# EAGLE board 13585_Weather Shield_V12_Panel (EAGLE 7.5.0), part 1 of 2
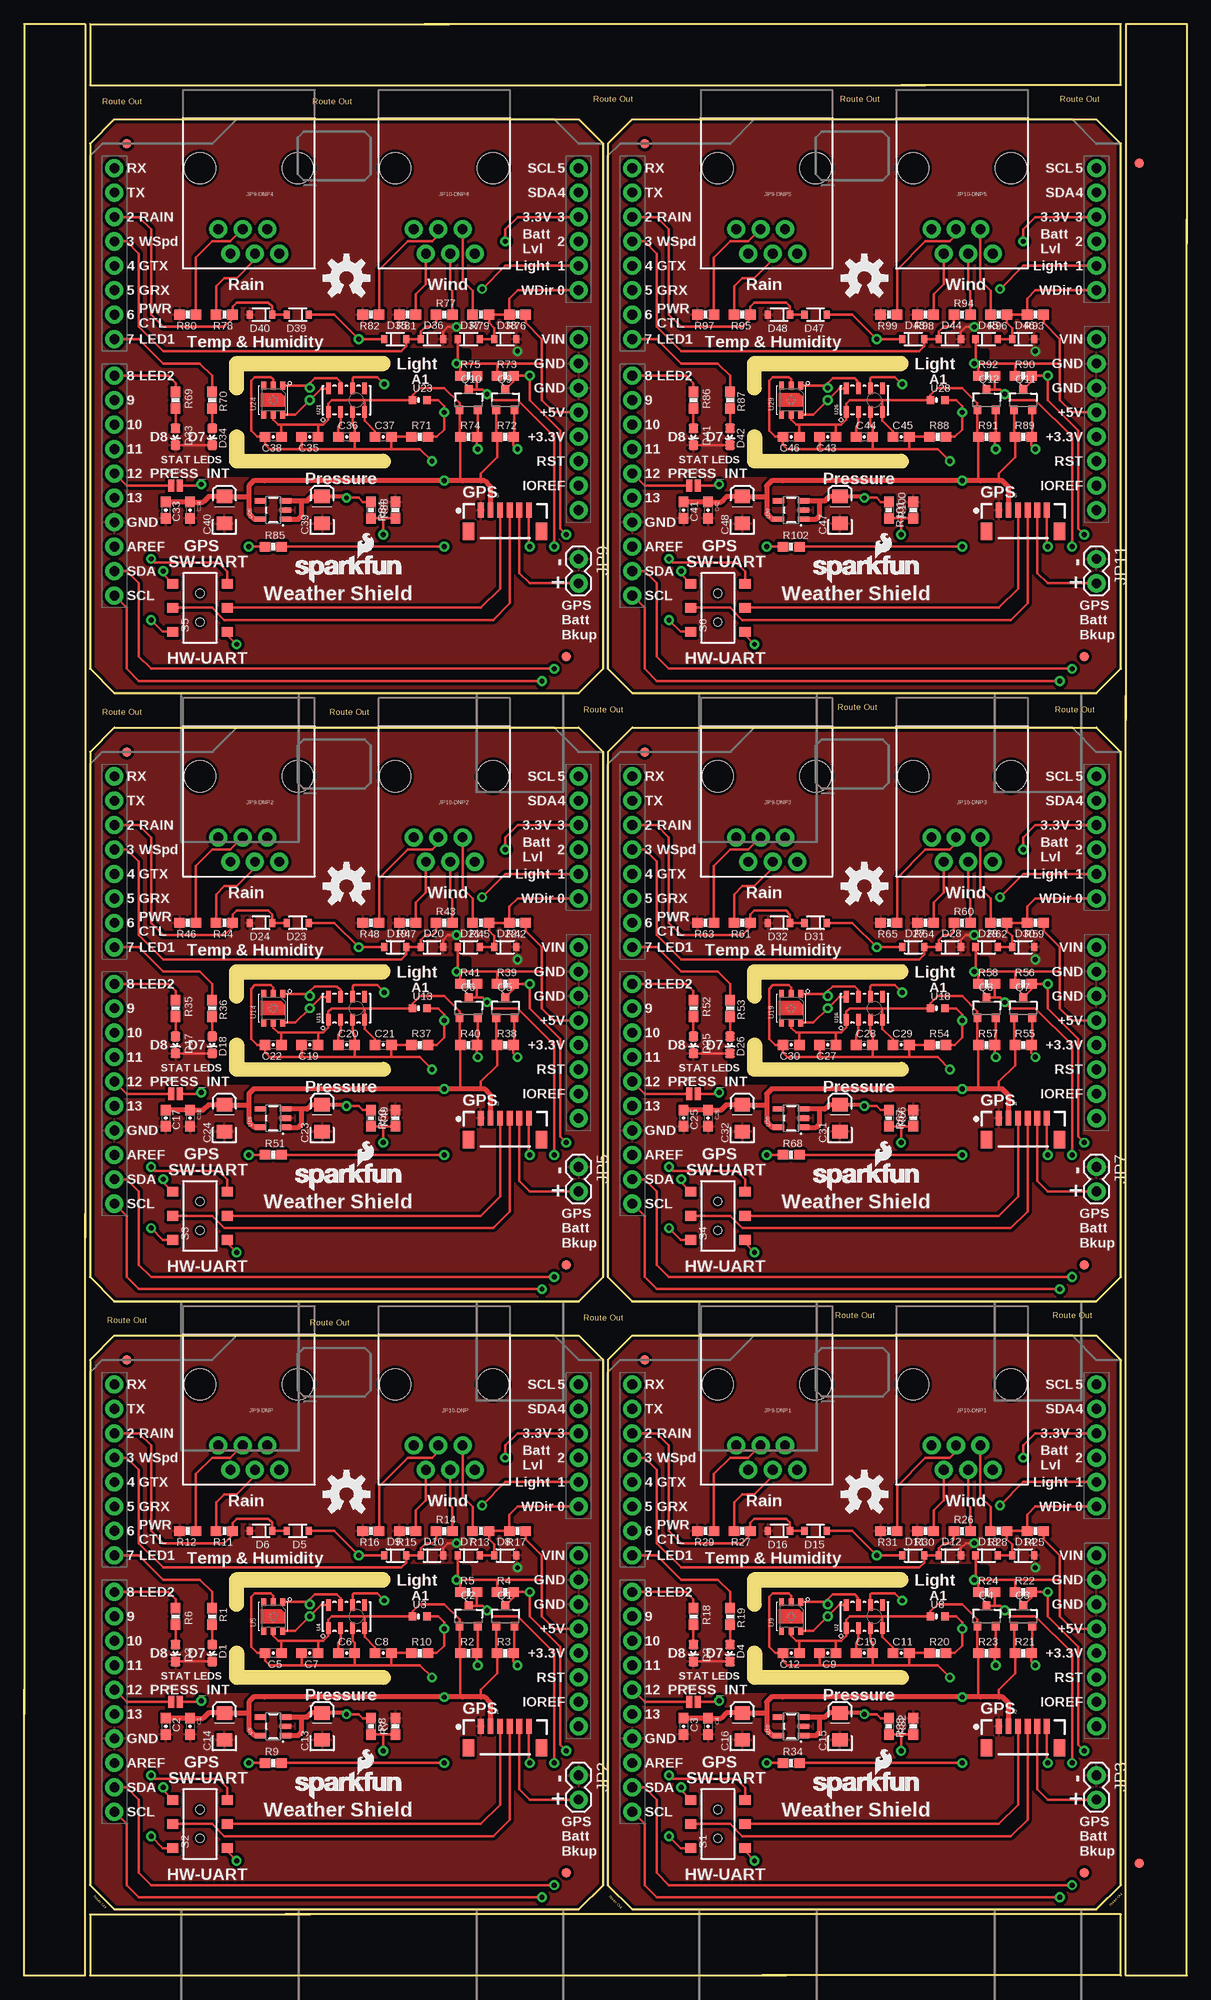
[diagram p0: board, top side]
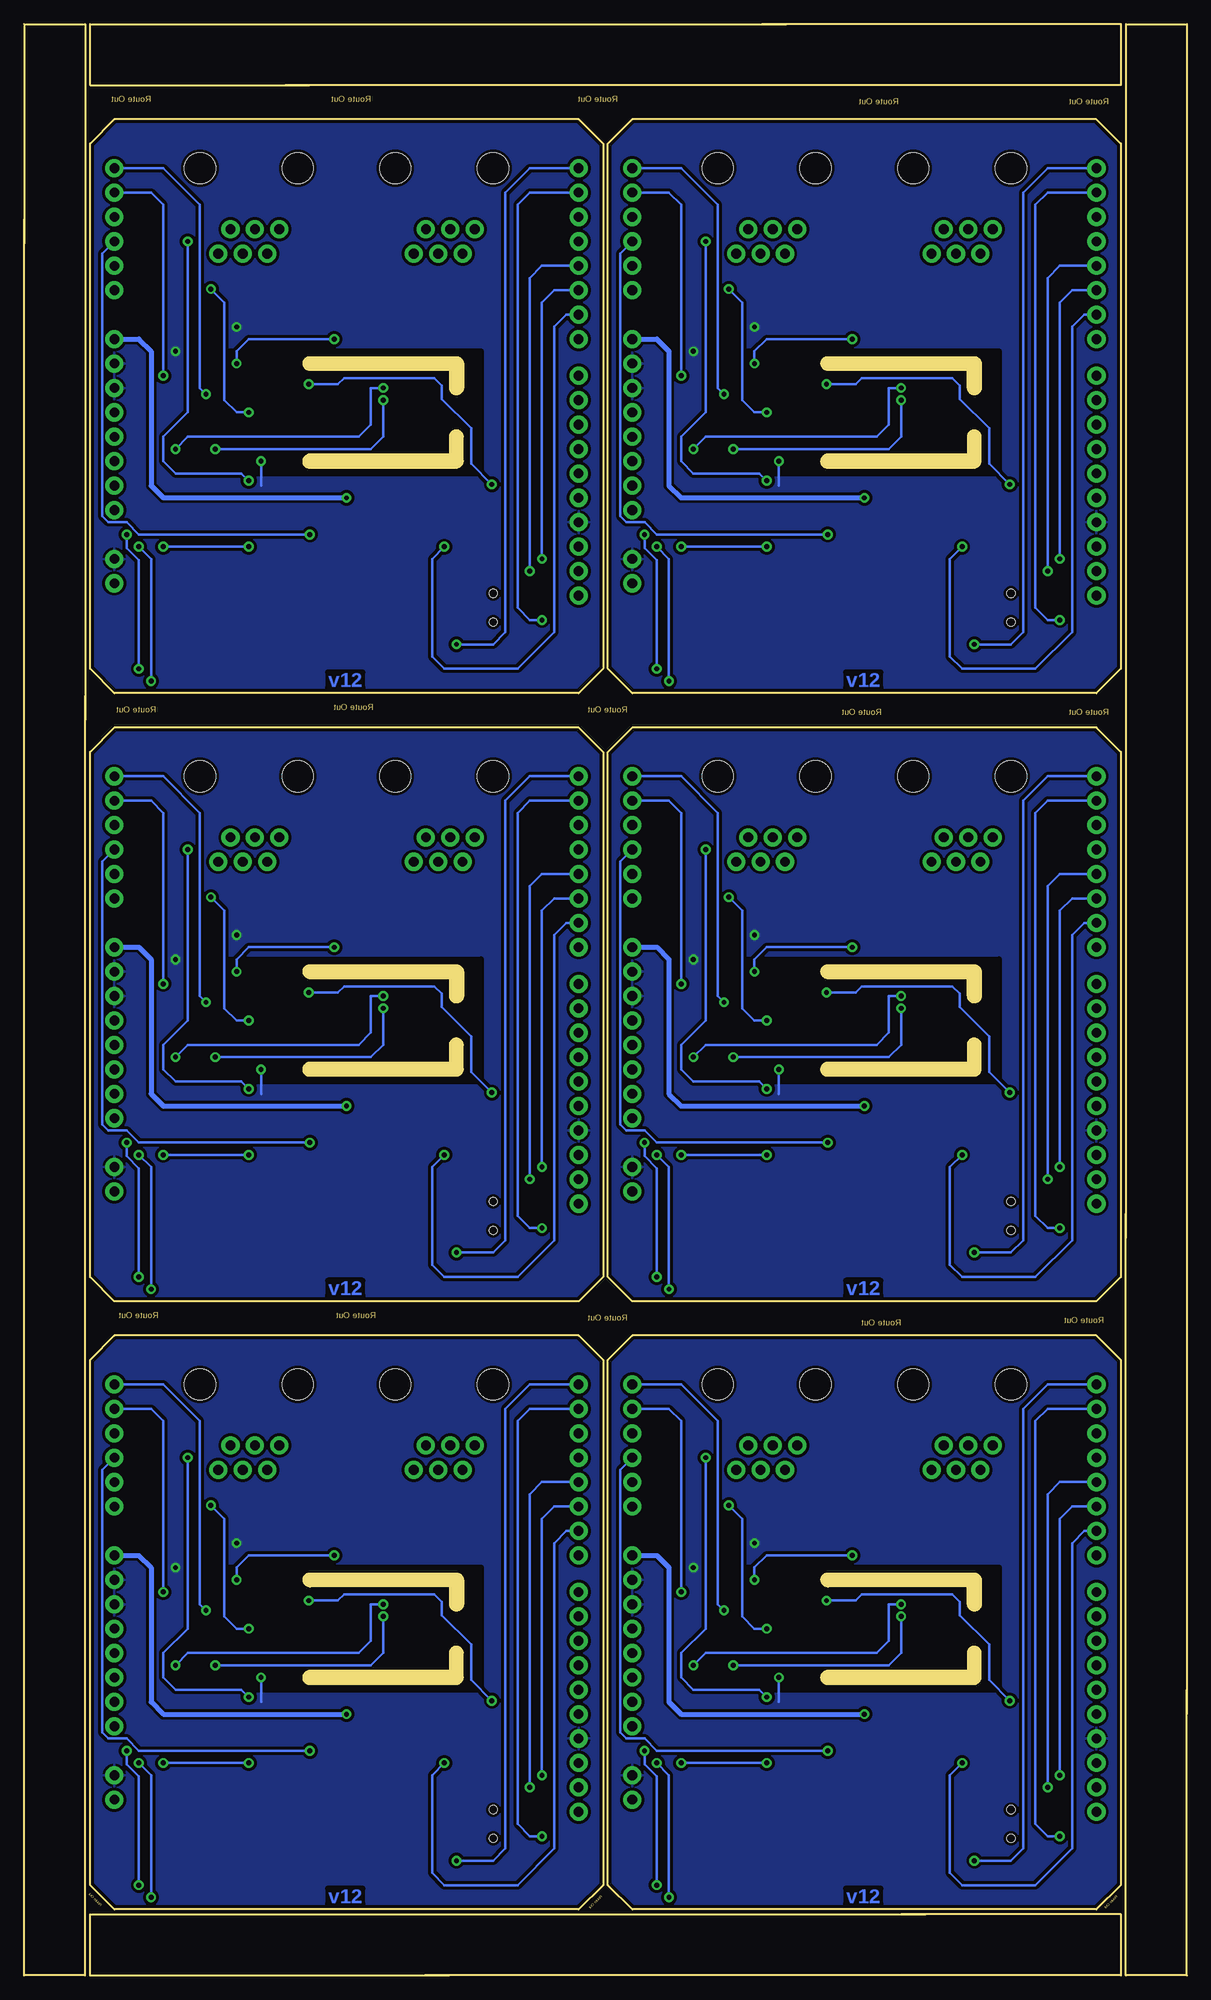
[diagram p1: board, bottom side, seen from below]

Size 120.9 x 202.95 mm. Coordinates in mm from the lower left corner, seen from the top.
Outline: 6.35,79.25 6.35,0 0,0 0,29.72
Outline: 0,27.18 0,202.95 6.35,202.95 6.35,76.71
Outline: 79.25,0 6.86,0 6.86,6.35 29.72,6.35
Outline: 27.18,6.35 114.05,6.35 114.05,0 76.71,0
Outline: 41.66,202.95 114.05,202.95 114.05,196.6 91.19,196.6
Outline: 93.73,196.6 6.86,196.6 6.86,202.95 44.2,202.95
Outline: 114.55,130.56 114.55,202.95 120.9,202.95 120.9,180.09
Outline: 120.9,182.63 120.9,0 114.55,0 114.55,133.1
Outline: 60.2,9.4 60.2,64.01 57.66,66.55 9.4,66.55 6.86,64.01 6.86,9.4 9.4,6.86 57.66,6.86 60.2,9.4
Outline: 21.41,41.1 21.41,38.63 arc90 22.1,37.95 arc90 22.76,38.61 22.76,40.46 37.29,40.46 arc90 38,41.17 arc90 37.36,41.81 22.12,41.81 arc90 21.41,41.1
Outline: 21.44,31.04 21.44,33.5 arc-90 22.12,34.19 arc-90 22.78,33.5 22.78,31.67 37.31,31.67 arc-90 38.02,30.96 arc-90 37.39,30.33 22.15,30.33 arc-90 21.44,31.04
Outline: 114.05,9.4 114.05,64.01 111.51,66.55 63.25,66.55 60.71,64.01 60.71,9.4 63.25,6.86 111.51,6.86 114.05,9.4
Outline: 75.26,41.1 75.26,38.63 arc90 75.95,37.95 arc90 76.61,38.61 76.61,40.46 91.14,40.46 arc90 91.85,41.17 arc90 91.21,41.81 75.97,41.81 arc90 75.26,41.1
Outline: 75.29,31.04 75.29,33.5 arc-90 75.97,34.19 arc-90 76.63,33.5 76.63,31.67 91.16,31.67 arc-90 91.87,30.96 arc-90 91.24,30.33 76,30.33 arc-90 75.29,31.04
Outline: 60.2,72.64 60.2,127.25 57.66,129.79 9.4,129.79 6.86,127.25 6.86,72.64 9.4,70.1 57.66,70.1 60.2,72.64
Outline: 21.41,104.34 21.41,101.88 arc90 22.1,101.19 arc90 22.76,101.85 22.76,103.71 37.29,103.71 arc90 38,104.42 arc90 37.36,105.05 22.12,105.05 arc90 21.41,104.34
Outline: 21.44,94.28 21.44,96.75 arc-90 22.12,97.43 arc-90 22.78,96.75 22.78,94.92 37.31,94.92 arc-90 38.02,94.21 arc-90 37.39,93.57 22.15,93.57 arc-90 21.44,94.28
Outline: 114.05,72.64 114.05,127.25 111.51,129.79 63.25,129.79 60.71,127.25 60.71,72.64 63.25,70.1 111.51,70.1 114.05,72.64
Outline: 75.26,104.34 75.26,101.88 arc90 75.95,101.19 arc90 76.61,101.85 76.61,103.71 91.14,103.71 arc90 91.85,104.42 arc90 91.21,105.05 75.97,105.05 arc90 75.26,104.34
Outline: 75.29,94.28 75.29,96.75 arc-90 75.97,97.43 arc-90 76.63,96.75 76.63,94.92 91.16,94.92 arc-90 91.87,94.21 arc-90 91.24,93.57 76,93.57 arc-90 75.29,94.28
Outline: 60.2,135.89 60.2,190.5 57.66,193.04 9.4,193.04 6.86,190.5 6.86,135.89 9.4,133.35 57.66,133.35 60.2,135.89
Outline: 21.41,167.59 21.41,165.12 arc90 22.1,164.44 arc90 22.76,165.1 22.76,166.95 37.29,166.95 arc90 38,167.66 arc90 37.36,168.3 22.12,168.3 arc90 21.41,167.59
Outline: 21.44,157.53 21.44,160 arc-90 22.12,160.68 arc-90 22.78,160 22.78,158.17 37.31,158.17 arc-90 38.02,157.46 arc-90 37.39,156.82 22.15,156.82 arc-90 21.44,157.53
Outline: 114.05,135.89 114.05,190.5 111.51,193.04 63.25,193.04 60.71,190.5 60.71,135.89 63.25,133.35 111.51,133.35 114.05,135.89
Outline: 75.26,167.59 75.26,165.12 arc90 75.95,164.44 arc90 76.61,165.1 76.61,166.95 91.14,166.95 arc90 91.85,167.66 arc90 91.21,168.3 75.97,168.3 arc90 75.26,167.59
Outline: 75.29,157.53 75.29,160 arc-90 75.97,160.68 arc-90 76.63,160 76.63,158.17 91.16,158.17 arc-90 91.87,157.46 arc-90 91.24,156.82 76,156.82 arc-90 75.29,157.53
Copper layers (1*16): Top 0.035mm / dielectric 1.5mm / Bottom 0.035mm
Design rules "SparkFun-2-layer-STANDARD": minimum track width 10mil, minimum drill 20mil, track to track 10mil, track to pad 8mil, pad to pad 8mil, via to via 10mil, smd to smd 8mil, copper to edge 8mil, drill to drill 8mil, minimum pad ring 10mil, minimum via ring 10mil, stop-mask expansion 4mil, vias tented up to drill 25mil, thermal gap 10mil
Net classes: 0 Default: width 0.203 mm; 1 vcc: width 0.203 mm
tRestrict: area 19.6,29.7 to 46.2,42.4; area 73.4,29.7 to 100.1,42.4; area 19.6,93 to 46.2,105.7; area 73.4,93 to 100.1,105.7; area 19.6,156.2 to 46.2,168.9; area 73.4,156.2 to 100.1,168.9
bRestrict: area 19.6,29.7 to 46.2,42.4; area 73.4,29.7 to 100.1,42.4; area 19.6,93 to 46.2,105.7; area 73.4,93 to 100.1,105.7; area 19.6,156.2 to 46.2,168.9; area 73.4,156.2 to 100.1,168.9
Milling: 24 lines

## Footprints (pad centres in the part's own frame; a part is rotated, then mirrored left to right if it is on the bottom)
0603-CAP = smd 1.1 x 1: 1 -0.85,0; 2 0.85,0
EIA3216 = smd 1.4 x 1.6: A 1.4,0; C -1.4,0
LED-0603 = smd 1 x 1: A 0,-0.877; C 0,0.877
SOD-323 = smd 0.63 x 0.83: A 1.15,0; C -1.15,0
FIDUCIAL-1X2 = smd 1 x 1: 1 0,0
GP-635T = smd 0.6 x 1.55: 1 -2.54,1.27; 2 -1.54,1.27; 3 -0.54,1.27; 4 0.46,1.27; 5 1.46,1.27; 6 2.46,1.27 | smd 1.2 x 1.8: P$1 -3.84,-0.955; P$2 3.76,-0.955
PAD-JUMPER-2-NO_NO_SILK = smd 0.635 x 1.27: 1 -0.45,0; 2 0.45,0
1X02 = drill 1.016 pad 1.88: 1 0,0; 2 2.54,0
RJ11-6 = drill 1.016 pad 1.88: 1 -3.175,8.89; 2 -1.905,6.35; 3 -0.635,8.89; 4 0.635,6.35; 5 1.905,8.89; 6 3.175,6.35 | hole 3.251: -5.08,0; 5.08,0
SOT23-3 = smd 0.8 x 0.9: 1 -0.95,-1; 2 0.95,-1; 3 0,1.1
0603-RES = smd 1.1 x 1: 1 -0.85,0; 2 0.85,0
0603 = smd 1.1 x 1: 1 -0.85,0; 2 0.85,0
AYZ0202 = smd 1 x 1.15: 1 -2.5,2.825; 2 0,2.825; 3 2.5,2.825; 4 -2.5,-2.825; 5 0,-2.825; 6 2.5,-2.825 | hole 0.85: 1.5,0; -1.5,0
UNO_R3_SHIELD = drill 1.016 pad 1.88: 3.3V 50.8,26.67; 5V 50.8,29.21; A0 50.8,41.91; A1 50.8,44.45; A2 50.8,46.99; A3 50.8,49.53; A4 50.8,52.07; A5 50.8,54.61; AREF 2.54,15.24; D2 2.54,49.53; D3 2.54,46.99; D4 2.54,44.45; D5 2.54,41.91; D6 2.54,39.37; D7 2.54,36.83; D8 2.54,33.02; D9 2.54,30.48; D10 2.54,27.94; D11 2.54,25.4; D12 2.54,22.86; D13 2.54,20.32; GND@0 50.8,31.75; GND@1 50.8,34.29; GND@2 2.54,17.78; IOREF 50.8,21.59; NC 50.8,19.05; RES 50.8,24.13; RX 2.54,54.61; SCL 2.54,10.16; SDA 2.54,12.7; TX 2.54,52.07; VIN 50.8,36.83
LGA8 = smd 1.2 x 0.5: 1 -1.2,1.875; 2 -1.2,0.625; 3 -1.2,-0.625; 4 -1.2,-1.875; 5 1.2,-1.875; 6 1.2,-0.625; 7 1.2,0.625; 8 1.2,1.875
ALS-PT19 = smd 0.8 x 0.8: C -0.75,0; E 0.75,0
SI7021 = smd 0.8 x 0.5: DATA 1.5,-1; GND 1.5,0; NC@3 1.5,1; NC@4 -1.5,1; SCK -1.5,-1; VDD -1.5,0
SOT23-5 = smd 0.55 x 1.2: 1 -0.95,-1.3; 2 0,-1.3; 3 0.95,-1.3; 4 0.95,1.3; 5 -0.95,1.3

## Placement (x,y rotation side)
C1  1.0uF  [0603-CAP]  17.27,25.91 270 top
C2  0.1uF  [0603-CAP]  14.73,25.91 270 top
C3  0.1uF  [0603-CAP]  68.58,25.91 270 top
C4  1.0uF  [0603-CAP]  71.12,25.91 270 top
C5  0.1uF  [0603-CAP]  25.91,33.53 180 top
C6  0.1uF  [0603-CAP]  33.53,33.53 0 top
C7  0.1uF  [0603-CAP]  29.72,33.53 180 top
C8  1.0uF  [0603-CAP]  37.34,33.53 0 top
C9  0.1uF  [0603-CAP]  83.57,33.53 180 top
C10  0.1uF  [0603-CAP]  87.38,33.53 0 top
C11  1.0uF  [0603-CAP]  91.19,33.53 0 top
C12  0.1uF  [0603-CAP]  79.76,33.53 180 top
C13  10uF  [EIA3216]  30.99,25.91 90 top
C14  10uF  [EIA3216]  20.83,25.91 90 top
C15  10uF  [EIA3216]  84.84,25.91 90 top
C16  10uF  [EIA3216]  74.68,25.91 90 top
C17  0.1uF  [0603-CAP]  14.73,89.15 270 top
C18  1.0uF  [0603-CAP]  17.27,89.15 270 top
C19  0.1uF  [0603-CAP]  29.72,96.77 180 top
C20  0.1uF  [0603-CAP]  33.53,96.77 0 top
C21  1.0uF  [0603-CAP]  37.34,96.77 0 top
C22  0.1uF  [0603-CAP]  25.91,96.77 180 top
C23  10uF  [EIA3216]  30.99,89.15 90 top
C24  10uF  [EIA3216]  20.83,89.15 90 top
C25  0.1uF  [0603-CAP]  68.58,89.15 270 top
C26  1.0uF  [0603-CAP]  71.12,89.15 270 top
C27  0.1uF  [0603-CAP]  83.57,96.77 180 top
C28  0.1uF  [0603-CAP]  87.38,96.77 0 top
C29  1.0uF  [0603-CAP]  91.19,96.77 0 top
C30  0.1uF  [0603-CAP]  79.76,96.77 180 top
C31  10uF  [EIA3216]  84.84,89.15 90 top
C32  10uF  [EIA3216]  74.68,89.15 90 top
C33  0.1uF  [0603-CAP]  14.73,152.4 270 top
C34  1.0uF  [0603-CAP]  17.27,152.4 270 top
C35  0.1uF  [0603-CAP]  29.72,160.02 180 top
C36  0.1uF  [0603-CAP]  33.53,160.02 0 top
C37  1.0uF  [0603-CAP]  37.34,160.02 0 top
C38  0.1uF  [0603-CAP]  25.91,160.02 180 top
C39  10uF  [EIA3216]  30.99,152.4 90 top
C40  10uF  [EIA3216]  20.83,152.4 90 top
C41  0.1uF  [0603-CAP]  68.58,152.4 270 top
C42  1.0uF  [0603-CAP]  71.12,152.4 270 top
C43  0.1uF  [0603-CAP]  83.57,160.02 180 top
C44  0.1uF  [0603-CAP]  87.38,160.02 0 top
C45  1.0uF  [0603-CAP]  91.19,160.02 0 top
C46  0.1uF  [0603-CAP]  79.76,160.02 180 top
C47  10uF  [EIA3216]  84.84,152.4 90 top
C48  10uF  [EIA3216]  74.68,152.4 90 top
D1  BLUE  [LED-0603]  19.56,33.53 180 top
D2  GREEN  [LED-0603]  69.6,33.53 180 top
D3  GREEN  [LED-0603]  15.75,33.53 180 top
D4  BLUE  [LED-0603]  73.41,33.53 180 top
D5  250mA/100V  [SOD-323]  28.45,46.23 180 top
D6  250mA/100V  [SOD-323]  24.64,46.23 180 top
D7  250mA/100V  [SOD-323]  46.23,43.69 0 top
D8  250mA/100V  [SOD-323]  50.04,43.69 0 top
D9  250mA/100V  [SOD-323]  38.61,43.69 0 top
D10  250mA/100V  [SOD-323]  42.42,43.69 0 top
D11  250mA/100V  [SOD-323]  92.46,43.69 0 top
D12  250mA/100V  [SOD-323]  96.27,43.69 0 top
D13  250mA/100V  [SOD-323]  100.08,43.69 0 top
D14  250mA/100V  [SOD-323]  103.89,43.69 0 top
D15  250mA/100V  [SOD-323]  82.3,46.23 180 top
D16  250mA/100V  [SOD-323]  78.49,46.23 180 top
D17  GREEN  [LED-0603]  15.75,96.77 180 top
D18  BLUE  [LED-0603]  19.56,96.77 180 top
D19  250mA/100V  [SOD-323]  38.61,106.93 0 top
D20  250mA/100V  [SOD-323]  42.42,106.93 0 top
D21  250mA/100V  [SOD-323]  46.23,106.93 0 top
D22  250mA/100V  [SOD-323]  50.04,106.93 0 top
D23  250mA/100V  [SOD-323]  28.45,109.47 180 top
D24  250mA/100V  [SOD-323]  24.64,109.47 180 top
D25  GREEN  [LED-0603]  69.6,96.77 180 top
D26  BLUE  [LED-0603]  73.41,96.77 180 top
D27  250mA/100V  [SOD-323]  92.46,106.93 0 top
D28  250mA/100V  [SOD-323]  96.27,106.93 0 top
D29  250mA/100V  [SOD-323]  100.08,106.93 0 top
D30  250mA/100V  [SOD-323]  103.89,106.93 0 top
D31  250mA/100V  [SOD-323]  82.3,109.47 180 top
D32  250mA/100V  [SOD-323]  78.49,109.47 180 top
D33  GREEN  [LED-0603]  15.75,160.02 180 top
D34  BLUE  [LED-0603]  19.56,160.02 180 top
D35  250mA/100V  [SOD-323]  38.61,170.18 0 top
D36  250mA/100V  [SOD-323]  42.42,170.18 0 top
D37  250mA/100V  [SOD-323]  46.23,170.18 0 top
D38  250mA/100V  [SOD-323]  50.04,170.18 0 top
D39  250mA/100V  [SOD-323]  28.45,172.72 180 top
D40  250mA/100V  [SOD-323]  24.64,172.72 180 top
D41  GREEN  [LED-0603]  69.6,160.02 180 top
D42  BLUE  [LED-0603]  73.41,160.02 180 top
D43  250mA/100V  [SOD-323]  92.46,170.18 0 top
D44  250mA/100V  [SOD-323]  96.27,170.18 0 top
D45  250mA/100V  [SOD-323]  100.08,170.18 0 top
D46  250mA/100V  [SOD-323]  103.89,170.18 0 top
D47  250mA/100V  [SOD-323]  82.3,172.72 180 top
D48  250mA/100V  [SOD-323]  78.49,172.72 180 top
E$7  [FIDUCIAL-1X2]  115.95,188.47 180 top
E$8  [FIDUCIAL-1X2]  115.95,11.68 0 top
FD1  FIDUCIAL1X2  [FIDUCIAL-1X2]  56.39,10.67 0 top
FD2  FIDUCIAL1X2  [FIDUCIAL-1X2]  10.67,64.01 0 top
FD3  FIDUCIAL1X2  [FIDUCIAL-1X2]  110.24,10.67 0 top
FD4  FIDUCIAL1X2  [FIDUCIAL-1X2]  64.52,64.01 0 top
FD5  FIDUCIAL1X2  [FIDUCIAL-1X2]  56.39,73.91 0 top
FD6  FIDUCIAL1X2  [FIDUCIAL-1X2]  10.67,127.25 0 top
FD7  FIDUCIAL1X2  [FIDUCIAL-1X2]  110.24,73.91 0 top
FD8  FIDUCIAL1X2  [FIDUCIAL-1X2]  64.52,127.25 0 top
FD9  FIDUCIAL1X2  [FIDUCIAL-1X2]  56.39,137.16 0 top
FD10  FIDUCIAL1X2  [FIDUCIAL-1X2]  10.67,190.5 0 top
FD11  FIDUCIAL1X2  [FIDUCIAL-1X2]  110.24,137.16 0 top
FD12  FIDUCIAL1X2  [FIDUCIAL-1X2]  64.52,190.5 0 top
J1  GP-735  [GP-635T]  50.04,24.64 0 top
J2  GP-735  [GP-635T]  103.89,24.64 0 top
J3  GP-735  [GP-635T]  50.04,87.88 0 top
J4  GP-735  [GP-635T]  103.89,87.88 0 top
J5  GP-735  [GP-635T]  50.04,151.13 0 top
J6  GP-735  [GP-635T]  103.89,151.13 0 top
JP1  [PAD-JUMPER-2-NO_NO_SILK]  15.75,28.45 0 top
JP2  External Batt Bckup  [1X02]  57.66,20.83 270 top
JP3  External Batt Bckup  [1X02]  111.51,20.83 270 top
JP4  [PAD-JUMPER-2-NO_NO_SILK]  69.6,28.45 0 top
JP5  External Batt Bckup  [1X02]  57.66,84.07 270 top
JP6  [PAD-JUMPER-2-NO_NO_SILK]  15.75,91.69 0 top
JP7  External Batt Bckup  [1X02]  111.51,84.07 270 top
JP8  [PAD-JUMPER-2-NO_NO_SILK]  69.6,91.69 0 top
JP9  External Batt Bckup  [1X02]  57.66,147.32 270 top
JP9-DNP  RJ11-RAIN  [RJ11-6]  23.37,61.47 180 top
JP9-DNP1  RJ11-RAIN  [RJ11-6]  77.22,61.47 180 top
JP9-DNP2  RJ11-RAIN  [RJ11-6]  23.37,124.71 180 top
JP9-DNP3  RJ11-RAIN  [RJ11-6]  77.22,124.71 180 top
JP9-DNP4  RJ11-RAIN  [RJ11-6]  23.37,187.96 180 top
JP9-DNP5  RJ11-RAIN  [RJ11-6]  77.22,187.96 180 top
JP10  [PAD-JUMPER-2-NO_NO_SILK]  15.75,154.94 0 top
JP10-DNP  RJ11-WIND  [RJ11-6]  43.69,61.47 180 top
JP10-DNP1  RJ11-WIND  [RJ11-6]  97.54,61.47 180 top
JP10-DNP2  RJ11-WIND  [RJ11-6]  43.69,124.71 180 top
JP10-DNP3  RJ11-WIND  [RJ11-6]  97.54,124.71 180 top
JP10-DNP4  RJ11-WIND  [RJ11-6]  43.69,187.96 180 top
JP10-DNP5  RJ11-WIND  [RJ11-6]  97.54,187.96 180 top
JP11  External Batt Bckup  [1X02]  111.51,147.32 270 top
JP12  [PAD-JUMPER-2-NO_NO_SILK]  69.6,154.94 0 top
LOGO1  OSHW-LOGOM  [OSHW-LOGO-M]  33.53,50.04 0 top
LOGO2  SFE_LOGO_NAME_FLAME.1_INCH  [SFE_LOGO_NAME_FLAME_.1]  27.81,18.29 0 top
LOGO3  SFE_LOGO_NAME_FLAME.1_INCH  [SFE_LOGO_NAME_FLAME_.1]  81.66,18.29 0 top
LOGO4  OSHW-LOGOM  [OSHW-LOGO-M]  87.38,50.04 0 top
LOGO5  SFE_LOGO_NAME_FLAME.1_INCH  [SFE_LOGO_NAME_FLAME_.1]  27.81,81.53 0 top
LOGO6  OSHW-LOGOM  [OSHW-LOGO-M]  33.53,113.28 0 top
LOGO7  SFE_LOGO_NAME_FLAME.1_INCH  [SFE_LOGO_NAME_FLAME_.1]  81.66,81.53 0 top
LOGO8  OSHW-LOGOM  [OSHW-LOGO-M]  87.38,113.28 0 top
LOGO9  SFE_LOGO_NAME_FLAME.1_INCH  [SFE_LOGO_NAME_FLAME_.1]  27.81,144.78 0 top
LOGO10  OSHW-LOGOM  [OSHW-LOGO-M]  33.53,176.53 0 top
LOGO11  SFE_LOGO_NAME_FLAME.1_INCH  [SFE_LOGO_NAME_FLAME_.1]  81.66,144.78 0 top
LOGO12  OSHW-LOGOM  [OSHW-LOGO-M]  87.38,176.53 0 top
Q1  200mA/50V  [SOT23-3]  50.04,37.34 0 top
Q2  200mA/50V  [SOT23-3]  46.23,37.34 0 top
Q3  200mA/50V  [SOT23-3]  103.89,37.34 0 top
Q4  200mA/50V  [SOT23-3]  100.08,37.34 0 top
Q5  200mA/50V  [SOT23-3]  50.04,100.58 0 top
Q6  200mA/50V  [SOT23-3]  46.23,100.58 0 top
Q7  200mA/50V  [SOT23-3]  103.89,100.58 0 top
Q8  200mA/50V  [SOT23-3]  100.08,100.58 0 top
Q9  200mA/50V  [SOT23-3]  50.04,163.83 0 top
Q10  200mA/50V  [SOT23-3]  46.23,163.83 0 top
Q11  200mA/50V  [SOT23-3]  103.89,163.83 0 top
Q12  200mA/50V  [SOT23-3]  100.08,163.83 0 top
R1  1K  [0603-RES]  19.56,37.34 270 top
R2  4.7K  [0603-RES]  46.23,33.53 0 top
R3  4.7K  [0603-RES]  50.04,33.53 0 top
R4  4.7K  [0603-RES]  50.04,39.88 0 top
R5  4.7K  [0603-RES]  46.23,39.88 0 top
R6  1K  [0603-RES]  15.75,37.34 270 top
R7  1K  [0603-RES]  38.61,25.91 90 top
R8  3.9K  [0603]  36.07,25.91 270 top
R9  4.7K  [0603-RES]  25.91,22.1 0 top
R10  10K  [0603-RES]  41.15,33.53 0 top
R11  1K  [0603-RES]  20.83,46.23 180 top
R12  1K  [0603-RES]  17.02,46.23 180 top
R13  1K  [0603-RES]  47.5,46.23 180 top
R14  1K  [0603-RES]  43.69,46.23 0 top
R15  1K  [0603-RES]  39.88,46.23 180 top
R16  1K  [0603-RES]  36.07,46.23 180 top
R17  4.7K  [0603-RES]  51.31,46.23 180 top
R18  1K  [0603-RES]  69.6,37.34 270 top
R19  1K  [0603-RES]  73.41,37.34 270 top
R20  10K  [0603-RES]  95,33.53 0 top
R21  4.7K  [0603-RES]  103.89,33.53 0 top
R22  4.7K  [0603-RES]  103.89,39.88 0 top
R23  4.7K  [0603-RES]  100.08,33.53 0 top
R24  4.7K  [0603-RES]  100.08,39.88 0 top
R25  4.7K  [0603-RES]  105.16,46.23 180 top
R26  1K  [0603-RES]  97.54,46.23 0 top
R27  1K  [0603-RES]  74.68,46.23 180 top
R28  1K  [0603-RES]  101.35,46.23 180 top
R29  1K  [0603-RES]  70.87,46.23 180 top
R30  1K  [0603-RES]  93.73,46.23 180 top
R31  1K  [0603-RES]  89.92,46.23 180 top
R32  1K  [0603-RES]  92.46,25.91 90 top
R33  3.9K  [0603]  89.92,25.91 270 top
R34  4.7K  [0603-RES]  79.76,22.1 0 top
R35  1K  [0603-RES]  15.75,100.58 270 top
R36  1K  [0603-RES]  19.56,100.58 270 top
R37  10K  [0603-RES]  41.15,96.77 0 top
R38  4.7K  [0603-RES]  50.04,96.77 0 top
R39  4.7K  [0603-RES]  50.04,103.12 0 top
R40  4.7K  [0603-RES]  46.23,96.77 0 top
R41  4.7K  [0603-RES]  46.23,103.12 0 top
R42  4.7K  [0603-RES]  51.31,109.47 180 top
R43  1K  [0603-RES]  43.69,109.47 0 top
R44  1K  [0603-RES]  20.83,109.47 180 top
R45  1K  [0603-RES]  47.5,109.47 180 top
R46  1K  [0603-RES]  17.02,109.47 180 top
R47  1K  [0603-RES]  39.88,109.47 180 top
R48  1K  [0603-RES]  36.07,109.47 180 top
R49  1K  [0603-RES]  38.61,89.15 90 top
R50  3.9K  [0603]  36.07,89.15 270 top
R51  4.7K  [0603-RES]  25.91,85.34 0 top
R52  1K  [0603-RES]  69.6,100.58 270 top
R53  1K  [0603-RES]  73.41,100.58 270 top
R54  10K  [0603-RES]  95,96.77 0 top
R55  4.7K  [0603-RES]  103.89,96.77 0 top
R56  4.7K  [0603-RES]  103.89,103.12 0 top
R57  4.7K  [0603-RES]  100.08,96.77 0 top
R58  4.7K  [0603-RES]  100.08,103.12 0 top
R59  4.7K  [0603-RES]  105.16,109.47 180 top
R60  1K  [0603-RES]  97.54,109.47 0 top
R61  1K  [0603-RES]  74.68,109.47 180 top
R62  1K  [0603-RES]  101.35,109.47 180 top
R63  1K  [0603-RES]  70.87,109.47 180 top
R64  1K  [0603-RES]  93.73,109.47 180 top
R65  1K  [0603-RES]  89.92,109.47 180 top
R66  1K  [0603-RES]  92.46,89.15 90 top
R67  3.9K  [0603]  89.92,89.15 270 top
R68  4.7K  [0603-RES]  79.76,85.34 0 top
R69  1K  [0603-RES]  15.75,163.83 270 top
R70  1K  [0603-RES]  19.56,163.83 270 top
R71  10K  [0603-RES]  41.15,160.02 0 top
R72  4.7K  [0603-RES]  50.04,160.02 0 top
R73  4.7K  [0603-RES]  50.04,166.37 0 top
R74  4.7K  [0603-RES]  46.23,160.02 0 top
R75  4.7K  [0603-RES]  46.23,166.37 0 top
R76  4.7K  [0603-RES]  51.31,172.72 180 top
R77  1K  [0603-RES]  43.69,172.72 0 top
R78  1K  [0603-RES]  20.83,172.72 180 top
R79  1K  [0603-RES]  47.5,172.72 180 top
R80  1K  [0603-RES]  17.02,172.72 180 top
R81  1K  [0603-RES]  39.88,172.72 180 top
R82  1K  [0603-RES]  36.07,172.72 180 top
R83  1K  [0603-RES]  38.61,152.4 90 top
R84  3.9K  [0603]  36.07,152.4 270 top
R85  4.7K  [0603-RES]  25.91,148.59 0 top
R86  1K  [0603-RES]  69.6,163.83 270 top
R87  1K  [0603-RES]  73.41,163.83 270 top
R88  10K  [0603-RES]  95,160.02 0 top
R89  4.7K  [0603-RES]  103.89,160.02 0 top
R90  4.7K  [0603-RES]  103.89,166.37 0 top
R91  4.7K  [0603-RES]  100.08,160.02 0 top
R92  4.7K  [0603-RES]  100.08,166.37 0 top
R93  4.7K  [0603-RES]  105.16,172.72 180 top
R94  1K  [0603-RES]  97.54,172.72 0 top
R95  1K  [0603-RES]  74.68,172.72 180 top
R96  1K  [0603-RES]  101.35,172.72 180 top
R97  1K  [0603-RES]  70.87,172.72 180 top
R98  1K  [0603-RES]  93.73,172.72 180 top
R99  1K  [0603-RES]  89.92,172.72 180 top
R100  1K  [0603-RES]  92.46,152.4 90 top
R101  3.9K  [0603]  89.92,152.4 270 top
R102  4.7K  [0603-RES]  79.76,148.59 0 top
S1  DPDT  [AYZ0202]  72.14,15.75 90 top
S2  DPDT  [AYZ0202]  18.29,15.75 90 top
S3  DPDT  [AYZ0202]  18.29,78.99 90 top
S4  DPDT  [AYZ0202]  72.14,78.99 90 top
S5  DPDT  [AYZ0202]  18.29,142.24 90 top
S6  DPDT  [AYZ0202]  72.14,142.24 90 top
U1  ARDUINO_R3_SHIELD  [UNO_R3_SHIELD]  6.86,6.86 0 top
U2  MPL3115A2LGA8  [LGA8]  87.38,37.34 90 top
U3  ALS-PT19  [ALS-PT19]  41.15,37.34 0 top
U4  MPL3115A2LGA8  [LGA8]  33.53,37.34 90 top
U5  SI7021  [SI7021]  25.91,37.34 90 top
U6  3.3V/150mA  [SOT23-5]  25.91,25.91 90 top
U7  ARDUINO_R3_SHIELD  [UNO_R3_SHIELD]  60.71,6.86 0 top
U8  ALS-PT19  [ALS-PT19]  95,37.34 0 top
U9  SI7021  [SI7021]  79.76,37.34 90 top
U10  3.3V/150mA  [SOT23-5]  79.76,25.91 90 top
U11  MPL3115A2LGA8  [LGA8]  33.53,100.58 90 top
U12  ARDUINO_R3_SHIELD  [UNO_R3_SHIELD]  6.86,70.1 0 top
U13  ALS-PT19  [ALS-PT19]  41.15,100.58 0 top
U14  SI7021  [SI7021]  25.91,100.58 90 top
U15  3.3V/150mA  [SOT23-5]  25.91,89.15 90 top
U16  MPL3115A2LGA8  [LGA8]  87.38,100.58 90 top
U17  ARDUINO_R3_SHIELD  [UNO_R3_SHIELD]  60.71,70.1 0 top
U18  ALS-PT19  [ALS-PT19]  95,100.58 0 top
U19  SI7021  [SI7021]  79.76,100.58 90 top
U20  3.3V/150mA  [SOT23-5]  79.76,89.15 90 top
U21  MPL3115A2LGA8  [LGA8]  33.53,163.83 90 top
U22  ARDUINO_R3_SHIELD  [UNO_R3_SHIELD]  6.86,133.35 0 top
U23  ALS-PT19  [ALS-PT19]  41.15,163.83 0 top
U24  SI7021  [SI7021]  25.91,163.83 90 top
U25  3.3V/150mA  [SOT23-5]  25.91,152.4 90 top
U26  MPL3115A2LGA8  [LGA8]  87.38,163.83 90 top
U27  ARDUINO_R3_SHIELD  [UNO_R3_SHIELD]  60.71,133.35 0 top
U28  ALS-PT19  [ALS-PT19]  95,163.83 0 top
U29  SI7021  [SI7021]  79.76,163.83 90 top
U30  3.3V/150mA  [SOT23-5]  79.76,152.4 90 top

## Library data of the parts
C1 C4 C8 C11 C18 C21 C26 C29 C34 C37 C42 C45 = SparkFun-Capacitors; PROD_ID: CAP-00868
C2 C3 C5-C7 C9 C10 C12 C17 C19 C20 C22 C25 C27 C28 C30 C33 C35 C36 C38 C41 C43 C44 C46 = SparkFun-Capacitors; PROD_ID: CAP-00810
C13-C16 C23 C24 C31 C32 C39 C40 C47 C48 = SparkFun-Capacitors; PROD_ID: CAP-00811
D1 D4 D18 D26 D34 D42 = SparkFun-LED; PROD_ID: DIO-08575
D2 D3 D17 D25 D33 D41 = SparkFun-LED; PROD_ID: DIO-00821
D5-D16 D19-D24 D27-D32 D35-D40 D43-D48 = SparkFun-DiscreteSemi; PROD_ID: DIO-09646
E$7 E$8 FD1-FD12 LOGO1-LOGO12 = SparkFun-Aesthetics
J1-J6 = SparkFun-Sensors; PROD_ID: CONN-08249
JP1 JP4 JP6 JP8 JP10 JP12 = SparkFun-Passives
JP2 JP3 JP5 JP7 JP9 JP11 = SparkFun-Connectors
JP9-DNP JP9-DNP1-JP9-DNP5 JP10-DNP JP10-DNP1-JP10-DNP5 = SparkFun-Connectors; PROD_ID: CONN-08590
Q1-Q12 = SparkFun-DiscreteSemi; PROD_ID: TRANS-00830
R1 R6 R7 R11-R16 R18 R19 R26-R32 R35 R36 R43-R49 R52 R53 R60-R66 R69 R70 R77-R83 R86 R87 R94-R100 = SparkFun-Resistors; PROD_ID: RES-07856
R2-R5 R9 R17 R21-R25 R34 R38-R42 R51 R55-R59 R68 R72-R76 R85 R89-R93 R102 = SparkFun-Resistors; PROD_ID: RES-07857
R8 R33 R50 R67 R84 R101 = SparkFun-Resistors; PROD_ID: RES-08701
R10 R20 R37 R54 R71 R88 = SparkFun-Resistors; PROD_ID: RES-00824
S1-S6 = SparkFun-Electromechanical; PROD_ID: SWCH-08179
U1 U7 U12 U17 U22 U27 = SparkFun-Boards
U2 U4 U11 U16 U21 U26 = SparkFun-Sensors; PROD_ID: IC-10869
U3 U8 U13 U18 U23 U28 = SparkFun-Sensors; PROD_ID: IC-11836
U5 U9 U14 U19 U24 U29 = SparkFun-Sensors; PROD_ID: IC-13093
U6 U10 U15 U20 U25 U30 = SparkFun-PowerIC; PROD_ID: VREG-00822

## Nets
3.3V: C1.1 C2.1 C5.1 C7.1 C8.1 C14.A J1.2 Q1.1 Q2.1 R2.1 R3.1 U1.A3 U3.C U4.1 U4.4 U5.VDD U6.5
3.3V1: C3.1 C4.1 C9.1 C11.1 C12.1 C16.A J2.2 Q3.1 Q4.1 R21.1 R23.1 U2.1 U2.4 U7.A3 U8.C U9.VDD U10.5
3.3V2: C17.1 C18.1 C19.1 C21.1 C22.1 C24.A J3.2 Q5.1 Q6.1 R38.1 R40.1 U11.1 U11.4 U12.A3 U13.C U14.VDD U15.5
3.3V3: C25.1 C26.1 C27.1 C29.1 C30.1 C32.A J4.2 Q7.1 Q8.1 R55.1 R57.1 U16.1 U16.4 U17.A3 U18.C U19.VDD U20.5
3.3V4: C33.1 C34.1 C35.1 C37.1 C38.1 C40.A J5.2 Q9.1 Q10.1 R72.1 R74.1 U21.1 U21.4 U22.A3 U23.C U24.VDD U25.5
3.3V5: C41.1 C42.1 C43.1 C45.1 C46.1 C48.A J6.2 Q11.1 Q12.1 R89.1 R91.1 U26.1 U26.4 U27.A3 U28.C U29.VDD U30.5
3V_PWR_CTL: J1.6 R9.2
3V_PWR_CTL1: J2.6 R34.2
3V_PWR_CTL2: J3.6 R51.2
3V_PWR_CTL3: J4.6 R68.2
3V_PWR_CTL4: J5.6 R85.2
3V_PWR_CTL5: J6.6 R102.2
5V: D5.C D7.C D9.C R4.1 R5.1 R17.1 U1.5V
5V1: D11.C D13.C D15.C R22.1 R24.1 R25.1 U7.5V
5V2: D19.C D21.C D23.C R39.1 R41.1 R42.1 U12.5V
5V3: D27.C D29.C D31.C R56.1 R58.1 R59.1 U17.5V
5V4: D35.C D37.C D39.C R73.1 R75.1 R76.1 U22.5V
5V5: D43.C D45.C D47.C R90.1 R92.1 R93.1 U27.5V
BATT_LVL: R7.1 R8.2 U1.A2
BATT_LVL1: R32.1 R33.2 U7.A2
BATT_LVL2: R49.1 R50.2 U12.A2
BATT_LVL3: R66.1 R67.2 U17.A2
BATT_LVL4: R83.1 R84.2 U22.A2
BATT_LVL5: R100.1 R101.2 U27.A2
GND [vcc]: C1.2 C2.2 C5.2 C6.2 C7.2 C8.2 C13.C C14.C D1.C D3.C D6.A D8.A D10.A J1.1 JP2.1 R7.2 R10.1 R12.2 R15.2 R16.2 U1.GND@0 U1.GND@1 U1.GND@2 U4.3 U5.GND U6.2
GND1 [vcc]: C3.2 C4.2 C9.2 C10.2 C11.2 C12.2 C15.C C16.C D2.C D4.C D12.A D14.A D16.A J2.1 JP3.1 R20.1 R29.2 R30.2 R31.2 R32.2 U2.3 U7.GND@0 U7.GND@1 U7.GND@2 U9.GND U10.2
GND2 [vcc]: C17.2 C18.2 C19.2 C20.2 C21.2 C22.2 C23.C C24.C D17.C D18.C D20.A D22.A D24.A J3.1 JP5.1 R37.1 R46.2 R47.2 R48.2 R49.2 U11.3 U12.GND@0 U12.GND@1 U12.GND@2 U14.GND U15.2
GND3 [vcc]: C25.2 C26.2 C27.2 C28.2 C29.2 C30.2 C31.C C32.C D25.C D26.C D28.A D30.A D32.A J4.1 JP7.1 R54.1 R63.2 R64.2 R65.2 R66.2 U16.3 U17.GND@0 U17.GND@1 U17.GND@2 U19.GND U20.2
GND4 [vcc]: C33.2 C34.2 C35.2 C36.2 C37.2 C38.2 C39.C C40.C D33.C D34.C D36.A D38.A D40.A J5.1 JP9.1 R71.1 R80.2 R81.2 R82.2 R83.2 U21.3 U22.GND@0 U22.GND@1 U22.GND@2 U24.GND U25.2
GND5 [vcc]: C41.2 C42.2 C43.2 C44.2 C45.2 C46.2 C47.C C48.C D41.C D42.C D44.A D46.A D48.A J6.1 JP11.1 R88.1 R97.2 R98.2 R99.2 R100.2 U26.3 U27.GND@0 U27.GND@1 U27.GND@2 U29.GND U30.2
GPS-RX: J1.4 S2.2
GPS-RX1: J2.4 S1.2
GPS-RX2: J3.4 S3.2
GPS-RX3: J4.4 S4.2
GPS-RX4: J5.4 S5.2
GPS-RX5: J6.4 S6.2
GPS-TX: J1.3 S2.5
GPS-TX1: J2.3 S1.5
GPS-TX2: J3.3 S3.5
GPS-TX3: J4.3 S4.5
GPS-TX4: J5.3 S5.5
GPS-TX5: J6.3 S6.5
GRXI: S2.6 U1.D5
GRXI1: S1.6 U7.D5
GRXI2: S3.6 U12.D5
GRXI3: S4.6 U17.D5
GRXI4: S5.6 U22.D5
GRXI5: S6.6 U27.D5
GTXO: S2.3 U1.D4
GTXO1: S1.3 U7.D4
GTXO2: S3.3 U12.D4
GTXO3: S4.3 U17.D4
GTXO4: S5.3 U22.D4
GTXO5: S6.3 U27.D4
HV_SCL: Q2.3 R5.2 U1.A5 U1.SCL
HV_SCL1: Q4.3 R24.2 U7.A5 U7.SCL
HV_SCL2: Q6.3 R41.2 U12.A5 U12.SCL
HV_SCL3: Q8.3 R58.2 U17.A5 U17.SCL
HV_SCL4: Q10.3 R75.2 U22.A5 U22.SCL
HV_SCL5: Q12.3 R92.2 U27.A5 U27.SCL
HV_SDA: Q1.3 R4.2 U1.A4 U1.SDA
HV_SDA1: Q3.3 R22.2 U7.A4 U7.SDA
HV_SDA2: Q5.3 R39.2 U12.A4 U12.SDA
HV_SDA3: Q7.3 R56.2 U17.A4 U17.SDA
HV_SDA4: Q9.3 R73.2 U22.A4 U22.SDA
HV_SDA5: Q11.3 R90.2 U27.A4 U27.SDA
INT-PRESSURE: JP1.2 U4.6
INT-PRESSURE1: JP4.2 U2.6
INT-PRESSURE2: JP6.2 U11.6
INT-PRESSURE3: JP8.2 U16.6
INT-PRESSURE4: JP10.2 U21.6
INT-PRESSURE5: JP12.2 U26.6
LIGHT: R10.2 U1.A1 U3.E
LIGHT1: R20.2 U7.A1 U8.E
LIGHT2: R37.2 U12.A1 U13.E
LIGHT3: R54.2 U17.A1 U18.E
LIGHT4: R71.2 U22.A1 U23.E
LIGHT5: R88.2 U27.A1 U28.E
N$1: JP10-DNP.3 R14.2
N$2: JP10-DNP.2 R13.2
N$3: D1.A R1.2
N$4: JP9-DNP.3 R11.2
N$5: C6.1 U4.2
N$6: JP1.1 U1.D12
N$7: D3.A R6.2
N$8: D2.A R18.2
N$9: D4.A R19.2
N$10: C10.1 U2.2
N$11: JP9-DNP.4 R12.1
N$12: JP10-DNP.5 R15.1
N$13: JP10-DNP.4 R16.1
N$14: JP10-DNP1.2 R28.2
N$15: JP10-DNP1.3 R26.2
N$16: JP9-DNP1.3 R27.2
N$17: JP9-DNP1.4 R29.1
N$18: JP10-DNP1.5 R30.1
N$19: JP10-DNP1.4 R31.1
N$20: JP4.1 U7.D12
N$21: D17.A R35.2
N$22: D18.A R36.2
N$23: C20.1 U11.2
N$24: JP10-DNP2.2 R45.2
N$25: JP10-DNP2.3 R43.2
N$26: JP9-DNP2.3 R44.2
N$27: JP9-DNP2.4 R46.1
N$28: JP10-DNP2.5 R47.1
N$29: JP10-DNP2.4 R48.1
N$30: JP6.1 U12.D12
N$31: D25.A R52.2
N$32: D26.A R53.2
N$33: C28.1 U16.2
N$34: JP10-DNP3.2 R62.2
N$35: JP10-DNP3.3 R60.2
N$36: JP9-DNP3.3 R61.2
N$37: JP9-DNP3.4 R63.1
N$38: JP10-DNP3.5 R64.1
N$39: JP10-DNP3.4 R65.1
N$40: JP8.1 U17.D12
N$41: D33.A R69.2
N$42: D34.A R70.2
N$43: C36.1 U21.2
N$44: JP10-DNP4.2 R79.2
N$45: JP10-DNP4.3 R77.2
N$46: JP9-DNP4.3 R78.2
N$47: JP9-DNP4.4 R80.1
N$48: JP10-DNP4.5 R81.1
N$49: JP10-DNP4.4 R82.1
N$50: JP10.1 U22.D12
N$51: D41.A R86.2
N$52: D42.A R87.2
N$53: C44.1 U26.2
N$54: JP10-DNP5.2 R96.2
N$55: JP10-DNP5.3 R94.2
N$56: JP9-DNP5.3 R95.2
N$57: JP9-DNP5.4 R97.1
N$58: JP10-DNP5.5 R98.1
N$59: JP10-DNP5.4 R99.1
N$60: JP12.1 U27.D12
PWR_CTL: R9.1 U1.D6
PWR_CTL1: R34.1 U7.D6
PWR_CTL2: R51.1 U12.D6
PWR_CTL3: R68.1 U17.D6
PWR_CTL4: R85.1 U22.D6
PWR_CTL5: R102.1 U27.D6
RAIN: D5.A D6.C R11.1 U1.D2
RAIN1: D15.A D16.C R27.1 U7.D2
RAIN2: JP9-DNP.2
RAIN3: JP9-DNP1.2
RAIN4: JP9-DNP1.5
RAIN5: JP9-DNP.5
RAIN6: D23.A D24.C R44.1 U12.D2
RAIN7: JP9-DNP2.2
RAIN8: JP9-DNP2.5
RAIN9: D31.A D32.C R61.1 U17.D2
RAIN10: JP9-DNP3.2
RAIN11: JP9-DNP3.5
RAIN12: D39.A D40.C R78.1 U22.D2
RAIN13: JP9-DNP4.2
RAIN14: JP9-DNP4.5
RAIN15: D47.A D48.C R95.1 U27.D2
RAIN16: JP9-DNP5.2
RAIN17: JP9-DNP5.5
RXI: S2.4 U1.RX
RXI1: S1.4 U7.RX
RXI2: S3.4 U12.RX
RXI3: S4.4 U17.RX
RXI4: S5.4 U22.RX
RXI5: S6.4 U27.RX
SCL: Q2.2 R2.2 U4.8 U5.SCK
SCL1: Q4.2 R23.2 U2.8 U9.SCK
SCL2: Q6.2 R40.2 U11.8 U14.SCK
SCL3: Q8.2 R57.2 U16.8 U19.SCK
SCL4: Q10.2 R74.2 U21.8 U24.SCK
SCL5: Q12.2 R91.2 U26.8 U29.SCK
SDA: Q1.2 R3.2 U4.7 U5.DATA
SDA1: Q3.2 R21.2 U2.7 U9.DATA
SDA2: Q5.2 R38.2 U11.7 U14.DATA
SDA3: Q7.2 R55.2 U16.7 U19.DATA
SDA4: Q9.2 R72.2 U21.7 U24.DATA
SDA5: Q11.2 R89.2 U26.7 U29.DATA
STAT1: R1.1 U1.D7
STAT2: R6.1 U1.D8
STAT3: R18.1 U7.D8
STAT4: R19.1 U7.D7
STAT5: R35.1 U12.D8
STAT6: R36.1 U12.D7
STAT7: R52.1 U17.D8
STAT8: R53.1 U17.D7
STAT9: R69.1 U22.D8
STAT10: R70.1 U22.D7
STAT11: R86.1 U27.D8
STAT12: R87.1 U27.D7
TXO: S2.1 U1.TX
TXO1: S1.1 U7.TX
TXO2: S3.1 U12.TX
TXO3: S4.1 U17.TX
TXO4: S5.1 U22.TX
TXO5: S6.1 U27.TX
V_BATT: J1.5 JP2.2
V_BATT1: J2.5 JP3.2
V_BATT2: J3.5 JP5.2
V_BATT3: J4.5 JP7.2
V_BATT4: J5.5 JP9.2
V_BATT5: J6.5 JP11.2
VIN [vcc]: C13.A R8.1 U1.VIN U6.1 U6.3
VIN1 [vcc]: C15.A R33.1 U7.VIN U10.1 U10.3
VIN2 [vcc]: C23.A R50.1 U12.VIN U15.1 U15.3
VIN3 [vcc]: C31.A R67.1 U17.VIN U20.1 U20.3
VIN4 [vcc]: C39.A R84.1 U22.VIN U25.1 U25.3
VIN5 [vcc]: C47.A R101.1 U27.VIN U30.1 U30.3
WDIR: D7.A D8.C R13.1 R17.2 U1.A0
WDIR1: D13.A D14.C R25.2 R28.1 U7.A0
WDIR2: D21.A D22.C R42.2 R45.1 U12.A0
WDIR3: D29.A D30.C R59.2 R62.1 U17.A0
WDIR4: D37.A D38.C R76.2 R79.1 U22.A0
WDIR5: D45.A D46.C R93.2 R96.1 U27.A0
WSPEED: D9.A D10.C R14.1 U1.D3
WSPEED1: D11.A D12.C R26.1 U7.D3
WSPEED2: D19.A D20.C R43.1 U12.D3
WSPEED3: D27.A D28.C R60.1 U17.D3
WSPEED4: D35.A D36.C R77.1 U22.D3
WSPEED5: D43.A D44.C R94.1 U27.D3